# Altium PCB Board.PcbDoc
Units mil, origin at the board's own origin, x right, y up, seen from the top; angles counter-clockwise.
Board outline 3960 x 1820 mil, 2 copper layers (Top Layer, Bottom Layer), stack 61.8 mil thick; 64 components, 64 nets, 260 pads, 48 vias.
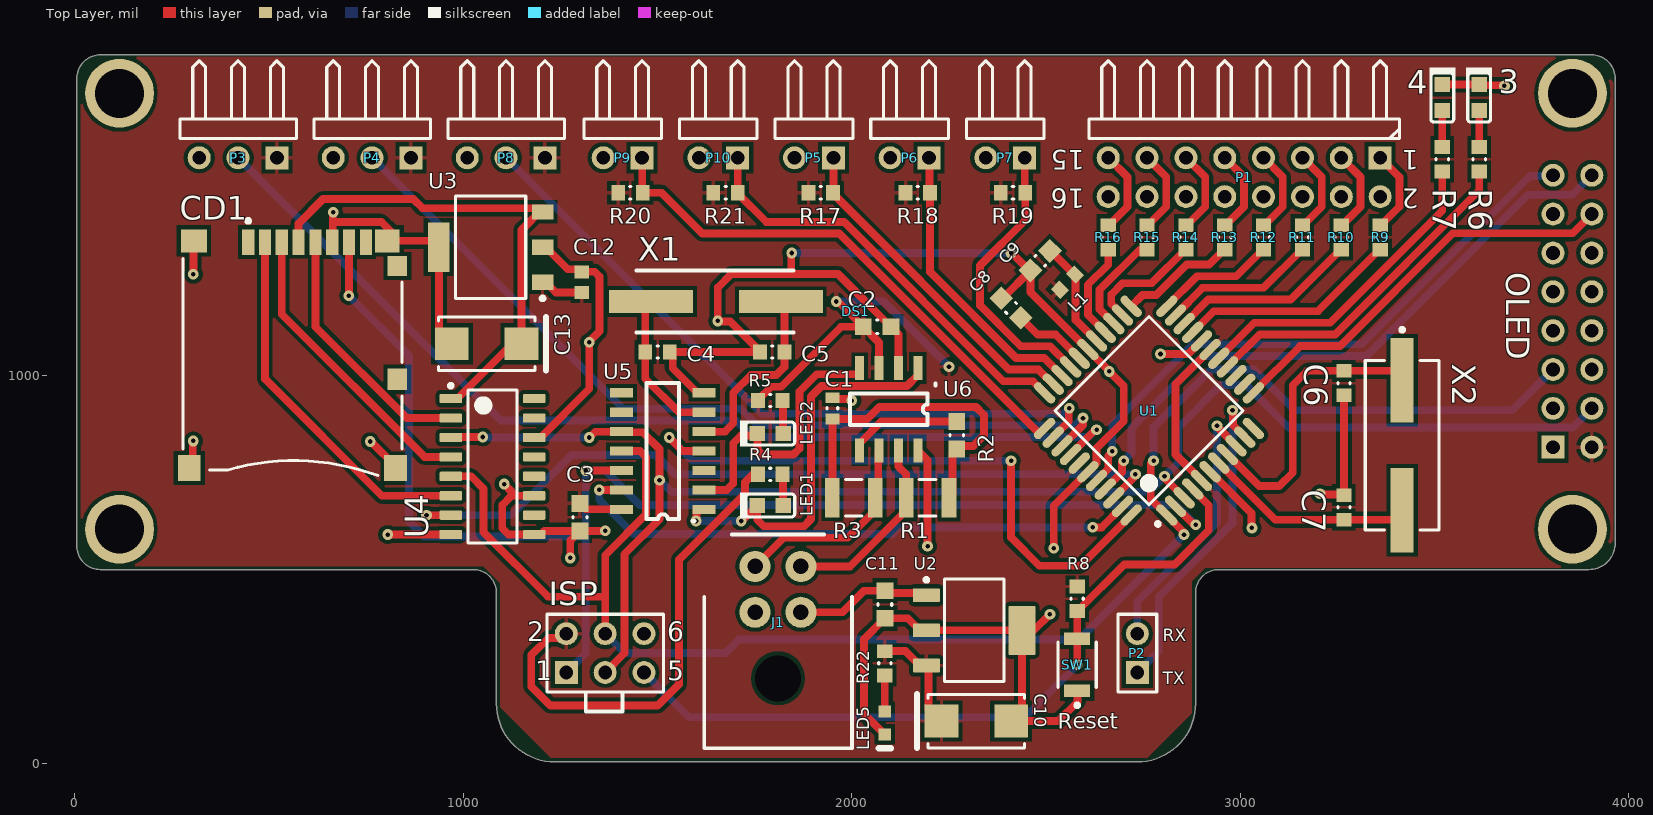
[diagram p0: Top Layer view]
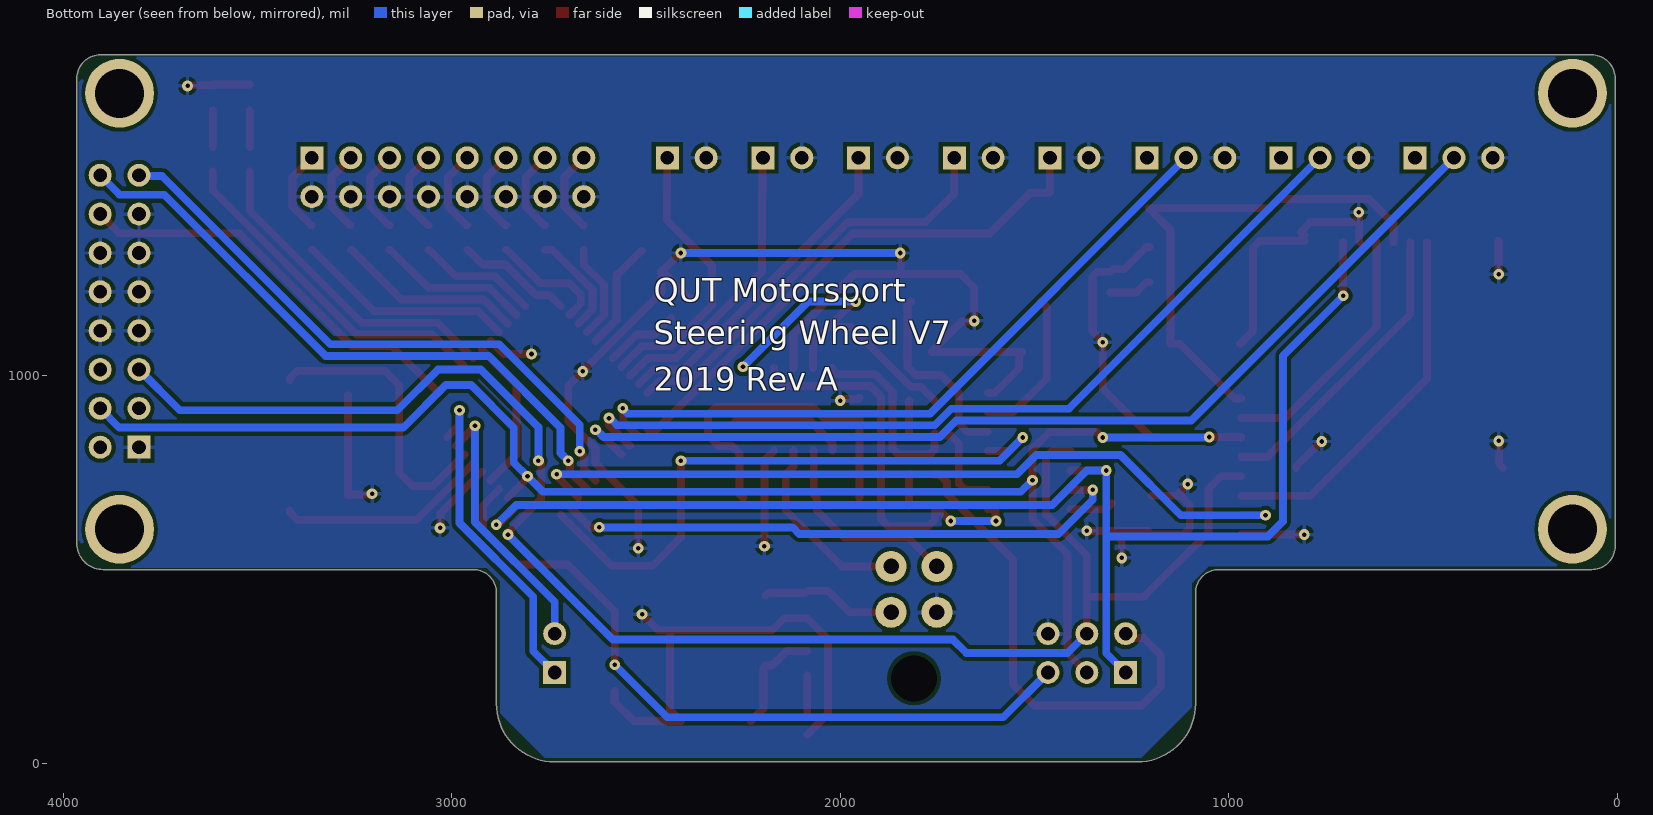
[diagram p1: Bottom Layer view, seen from below]

## Layer stack, top to bottom
Top Solder: solder mask 0.4, Solder Resist, Dk 3.5
Top Layer: signal copper 1.4
Dielectric 1: core 59, Core-043, Dk 4.3
Bottom Layer: signal copper 1.4
Bottom Solder: solder mask 0.4, Solder Resist, Dk 3.5

## Board outline
1025,500 cw(c1025,440) 1085,440 1085,155 ccw(c1235,155) 1235,5 2735,5 ccw(c2735,155) 2885,155 2885,440 cw(c2945,440) 2945,500 3897.61,500 ccw(c3897.61,567.39) 3965,567.39 3965,1765 ccw(c3905,1765) 3905,1825 65,1825 ccw(c65,1765) 5,1765 5,560 ccw(c65,560) 65,500

## Design rules (kind name [scope] priority, off if disabled: settings)
Clearance [All] p1: gap=10 ignorepadtopadclearanceinfootprint=FALSE except(0: Arc-Hole Track-Hole SMDPad-Hole THPad-Hole Via-Hole Fill-Hole Poly-Hole Region-Hole Text-Hole; 6: Arc-SMDPad Track-SMDPad SMDPad-SMDPad)
PolygonConnect [All] p1: connectstyle=Relief reliefconductorwidth=10 reliefentries=4 polygonreliefangle="90 Angle" airgapwidth=10
RoutingVias [All] p1: holewidth=11.81 width=27.56 viastyle="Through Hole" minholewidth=11.81 minwidth=27.56 maxholewidth=11.81 maxwidth=27.56
SolderMaskExpansion [All] p1: expansion=4
Width [All] p1: maxlimit=30 minlimit=10 preferedwidth=20 minimp=50.000000 maximp=50.000000 favimp=50.000000
30 further rules are at their usual default settings.

## Classes and differential pairs
component class SDCard: CD1 U4
component class "Linear Regulator": C10 C11 C12 C13 LED5 R22 U2 U3
component class Input: P3 P4 P5 P6 P7 P8 P9 P10 R17 R18 R19 R20 R21
component class Control: 3 4 C6 C7 C8 C9 DS1 ISP J1 L1 P1 P2 R6 R7 R8 R9 R10 R11 R12 R13 R14 R15 R16 SW1 U1 X2
component class CAN: C1 C2 C3 C4 C5 LED1 LED2 R1 R2 R3 R4 R5 U5 U6 X1

## Components (designator, comment, footprint, x,y, rotation, side; value= is the part's Value field where it differs from the comment)
3 "2V 20mA 0603 Org" KING-LED0603-25-ORANGE_V 3615,1715 r270 top (schematic designator LED3)
4 "2V 20mA 0603 Org" KING-LED0603-25-ORANGE_V 3520,1715 r270 top (schematic designator LED4)
C1 "CAP 4.7nF 50V" CAPC0603(1608)100_L 1950,915 r90 top value=4.7nF
C2 "100nF" CAPC0603(1608)100_M 2065,1125 r180 top
C3 "100nF" CAPC0603(1608)100_M 1300,635 r90 top
C4 "CAP 22pF 16V 0603(1608)" CAPC0603(1608)100_N 1500,1060 r180 top value=22pF
C5 "CAP 22pF 16V 0603(1608)" CAPC0603(1608)100_N 1795,1060 r180 top value=22pF
C6 "CAP 22pF 16V" CAPC0603(1608)100_N 3266.79,980 r90 top value=22pF
C7 "CAP 22pF 16V" CAPC0603(1608)100_N 3266.79,660 r90 top value=22pF
C8 "100nF" CAPC0603(1608)100_M 2410,1173.54 r315 top
C9 "100nF" CAPC0603(1608)100_M 2485,1295 r45 top
C10 "T491C106K016AT" KEMT-T491-C_L 2320.43,110 r0 top
C11 "CAP 100nF 25V" CAPC0603(1608)100_M 2085,410 r90 top value=100nF
C12 "CAP CER 4.7µF" CAPC1608X90X35NL10T15 1305,1240 r270 top
C13 "T491C106K016AT" KEMT-T491-C_L 1060,1081.32 r180 top
CD1 "502774-0891" MOLX-502774-0891_V 560.12,1052.01 r0 top
DS1 "ER-OLEDM032-1Y" ER-OLEDM032-1Y 1985,1200 r0 top locked
ISP "Header 3X2" HDR2X3 1265,235 r0 top (schematic designator ISP1)
J1 "Microfit 3.0 2x2" Microfit_2X2_R_TH 1810,220 r0 top
L1 "Inductor" 1608[0603] 2555,1240 r225 top value=10µH
LED1 "2V 20mA 0603 Org" KING-LED0603-25-ORANGE_V 1790,665 r0 top
LED2 "2V 20mA 0603 Org" KING-LED0603-25-ORANGE_V 1790,850.2 r0 top
LED5 "2V 20mA 0603 Green" LITE-ON-LTST-C191KRKT-2_V 2085,105 r270 top (schematic designator LED)
P1 "Header 8X2" HDR2X8H 3360,1560 r180 top
P2 "UARTCON" HDR1X2 2735,235 r90 top
P3 "POT-1" HDR1X3H 520,1560 r180 top
P4 "POT-2" HDR1X3H 865,1560 r180 top
P5 "Header 2" HDR1X2H 1952.5,1560 r180 top
P6 "Header 2" HDR1X2H 2198.75,1560 r180 top
P7 "Header 2" HDR1X2H 2445,1560 r180 top
P8 "POT-1" HDR1X3H 1210,1560 r180 top
P9 "PADL_A" HDR1X2H 1460,1560 r180 top
P10 "PADL_B" HDR1X2H 1706.25,1560 r180 top
R1 "60R4 1% 1210" RESC1210(3225)_L 2195,685 r180 top value="60.40 Ohm"
R2 "300R 1%" RESC0603(1608)_M 2270,845.54 r270 top value="300.00 Ohm"
R3 "60R4 1% 1210" RESC1210(3225)_L 2005,685 r180 top value="60.40 Ohm"
R4 "300R 5% 0603(1608)" RESC0603(1608)_N 1790,745 r0 top value="300.00 Ohm"
R5 "300R 5% 0603(1608)" RESC0603(1608)_N 1790,935 r0 top value="300.00 Ohm"
R6 "300R 5% 0603(1608)" RESC0603(1608)_N 3615,1556.5 r270 top value="300.00 Ohm"
R7 "300R 5% 0603(1608)" RESC0603(1608)_N 3520,1556.5 r270 top value="300.00 Ohm"
R8 "10K 5% 0603(1608)" RESC0603(1608)_N 2580,425 r90 top value="10000.00 Ohm"
R9 "JMP" RESC0603(1608)_N 3360,1355 r270 top value="300.00 Ohm"
R10 "JMP" RESC0603(1608)_N 3260,1355 r270 top value="300.00 Ohm"
R11 "JMP" RESC0603(1608)_N 3160,1355 r270 top value="300.00 Ohm"
R12 "JMP" RESC0603(1608)_N 3060,1355 r270 top value="300.00 Ohm"
R13 "JMP" RESC0603(1608)_N 2960,1355 r270 top value="300.00 Ohm"
R14 "JMP" RESC0603(1608)_N 2860,1355 r270 top value="300.00 Ohm"
R15 "JMP" RESC0603(1608)_N 2760,1355 r270 top value="300.00 Ohm"
R16 "" RESC0603(1608)_N 2660,1355 r270 top value="300.00 Ohm"
R17 "10K" RESC0603(1608)_N 1920,1470 r0 top value="10000.00 Ohm"
R18 "10K" RESC0603(1608)_N 2170,1470 r0 top value="10000.00 Ohm"
R19 "10K" RESC0603(1608)_N 2415,1470 r0 top value="10000.00 Ohm"
R20 "10K" RESC0603(1608)_N 1430,1470 r0 top value="10000.00 Ohm"
R21 "10K" RESC0603(1608)_N 1675,1470 r0 top value="10000.00 Ohm"
R22 "300R 5% 0603(1608)" RESC0603(1608)_N 2085,258.5 r90 top value="300.00 Ohm"
SW1 "B3U-1000P" OMRON-B3U-1000_V 2580,255 r90 top
U1 "ATmega1284P-AU" 44A_N 2765,909.03 r135 top
U2 "LM2937IMP-5.0" DCY0004A_N 2315,343.46 r0 top
U3 "LT1521CST-3.3#PBF" LT-ST-3-SOT-223_N 1070,1330 r180 top
U4 "CD74HC4050M" D0016A_N 1075,765 r0 top
U5 "MCP2517FD" "MCP2517FD SOIC" 1620,655 r180 top (schematic designator U)
U6 "MCP2561" "MCP2561 SOIC" 2170,1019.09 r270 top (schematic designator U)
X1 "Crystal 20MHz" "Crystal 20MHz" 1650,1190 r0 top
X2 "ATS16ASM-1" CTS-ATS-SM-XTAL-2 3416.79,820 r270 top

## Footprints (in the part's own frame and the unit in brackets; to place one, negate y for a bottom-side part, rotate by r counter-clockwise, add the part's x,y. Pads: shape width x height; smd on the part's side, far side on the other; paste and mask are expansions set on the pad)
44A_N [mm] "Thin QFP, 44-Leads, Body 10x10mm, Pitch 0.8mm, IPC Medium Density"
  oval 1.75x0.55 smd: 1(-5.65,4) 2(-5.65,3.2) 3(-5.65,2.4) 4(-5.65,1.6) 5(-5.65,0.8) 6(-5.65,0) 7(-5.65,-0.8) 8(-5.65,-1.6) 9(-5.65,-2.4) 10(-5.65,-3.2) 11(-5.65,-4) 23(5.65,-4) 24(5.65,-3.2) 25(5.65,-2.4) 26(5.65,-1.6) 27(5.65,-0.8) 28(5.65,0) 29(5.65,0.8) 30(5.65,1.6) 31(5.65,2.4) 32(5.65,3.2) 33(5.65,4)
  oval 0.55x1.75 smd: 12(-4,-5.65) 13(-3.2,-5.65) 14(-2.4,-5.65) 15(-1.6,-5.65) 16(-0.8,-5.65) 17(0,-5.65) 18(0.8,-5.65) 19(1.6,-5.65) 20(2.4,-5.65) 21(3.2,-5.65) 22(4,-5.65) 34(4,5.65) 35(3.2,5.65) 36(2.4,5.65) 37(1.6,5.65) 38(0.8,5.65) 39(0,5.65) 40(-0.8,5.65) 41(-1.6,5.65) 42(-2.4,5.65) 43(-3.2,5.65) 44(-4,5.65)
  silkscreen extent -5.77,-4.35 4.35,4.95, body extent -5,-5 5,5, height 1.2
1608[0603] [mm] "Chip Capacitor, Body 1.6x0.8mm, IPC High Density"
  rect 0.8x0.9 smd: 1(-0.7,0) 2(0.7,0)
  body extent -0.87,-0.47 0.87,0.47, height 1.3
CAPC0603(1608)100_L [mm] "Chip Capacitor, Body 1.6x0.8mm, Height 1.0mm, IPC High Density"
  rect 0.7x0.9 smd: 1(-0.7,0) 2(0.7,0)
  silkscreen extent -0.05,-0.35 0.05,0.35, body extent -0.87,-0.47 0.88,0.48, height 1
CAPC0603(1608)100_M [mm] "Chip Capacitor, Body 1.6x0.8mm, Height 1.0mm, IPC Low Density"
  rect 1.1x1.1 smd: 1(-0.9,0) 2(0.9,0)
  silkscreen extent -0.05,-0.45 0.05,0.45, body extent -0.87,-0.47 0.88,0.48, height 1
CAPC0603(1608)100_N [mm] "Chip Capacitor, Body 1.6x0.8mm, Height 1.0mm, IPC Medium Density"
  rect 0.9x1 smd: 1(-0.8,0) 2(0.8,0)
  silkscreen extent -0.05,-0.4 0.05,0.4, body extent -0.87,-0.48 0.88,0.47, height 1
CAPC1608X90X35NL10T15 [mm] "Chip Capacitor, 2-Leads, Body 1.60x0.80mm, IPC Medium Density"
  rect 0.85x0.95 smd: 1(-0.675,0) 2(0.675,0)
  body extent -0.85,-0.45 0.85,0.45, height 0.9
"Crystal 20MHz" [mm]
  rect 5.5x1.5 smd: 1(-4.25,0) 2(4.25,0)
  silkscreen extent -5.21,-2.03 5.08,2.03, body extent -5.29,-1.91 5.21,1.9, height 4.3
CTS-ATS-SM-XTAL-2 [mm] "SMD, 2-Leads, Body 11.1x4.83mm, Pitch 8.5mm"
  rect 5.5x1.5 smd: 1(-4.25,0) 2(4.25,0)
  silkscreen extent -7.67,-2.41 5.55,2.41, body extent -5.59,-2.42 5.59,2.42, height 4.3
D0016A_N [mm] "SOIC, 16-Leads, Body 10x4mm, Pitch 1.27mm, IPC Medium Density"
  rrect17% 1.45x0.6 smd: 1(-2.725,4.445) 2(-2.725,3.175) 3(-2.725,1.905) 4(-2.725,0.635) 5(-2.725,-0.635) 6(-2.725,-1.905) 7(-2.725,-3.175) 8(-2.725,-4.445) 9(2.725,-4.445) 10(2.725,-3.175) 11(2.725,-1.905) 12(2.725,-0.635) 13(2.725,0.635) 14(2.725,1.905) 15(2.725,3.175) 16(2.725,4.445)
  silkscreen extent -2.85,-5 1.6,5.42, body extent -3,-4.95 3,4.95, height 1.59
DCY0004A_N [mm] "SOT223, 4-Leads, Body 6.7x3.7mm, Pitch 2.3mm, IPC Medium Density"
  rrect11% 1.75x0.9 smd: 1(-3.125,2.3) 2(-3.125,0) 3(-3.125,-2.3)
  rrect6% 1.75x3.2 smd: 4(3.125,0)
  silkscreen extent -3.25,-3.35 1.95,3.42, body extent -3.5,-3.25 3.5,3.25, height 1.62
ER-OLEDM032-1Y [mm] "SPI 3.2 inch OLED Module Display 256x64 Panel Screen,Yellow on Black"
  rect 1.5x1.5 hole 0.9: 1(46.228,-9.779)
  round 1.5 hole 0.9: 2(48.768,-9.779) 3(46.228,-7.239) 4(48.768,-7.239) 5(46.228,-4.699) 6(48.768,-4.699) 7(46.228,-2.159) 8(48.768,-2.159) 9(46.228,0.381) 10(48.768,0.381) 11(46.228,2.921) 12(48.768,2.921) 13(46.228,5.461) 14(48.768,5.461) 15(46.228,8.001) 16(48.768,8.001)
  round 4.5 hole 3.2 unplated: NC(-47.502,13.361) NC(-47.502,-15.139) NC(47.498,-15.139) NC(47.498,13.361)
  body extent -50.29,-17.7 50.29,15.89, height 17.8
HDR1X2 [mm] "Connector; Header; 2 Position"
  rect 1.5x1.5 hole 0.9: 1(0,0)
  round 1.5 hole 0.9: 2(2.54,0)
  silkscreen extent -1.27,-1.27 3.81,1.27
HDR1X2H [mm] "Connector; Header; 2 Position; Right Angle"
  rect 1.5x1.5 hole 0.9: 1(0,0)
  round 1.5 hole 0.9: 2(2.54,0)
  silkscreen extent -1.27,-6.35 3.81,-1.27
HDR1X3H [mm] "Connector; Header; 3 Position; Right Angle"
  rect 1.5x1.5 hole 0.9: 1(0,0)
  round 1.5 hole 0.9: 2(2.54,0) 3(5.08,0)
  silkscreen extent -1.27,-6.35 6.35,-1.27
HDR2X3 [mm] "Connector; Header; 3x2 Position"
  rect 1.5x1.5 hole 0.9: 1(0,0)
  round 1.5 hole 0.9: 2(0,2.54) 3(2.54,0) 4(2.54,2.54) 5(5.08,0) 6(5.08,2.54)
  silkscreen extent -1.27,-1.27 6.35,3.81
HDR2X8H [mm] "Connector; Header; 8x2 Position; Right Angle"
  rect 1.5x1.5 hole 0.9: 1(0,0)
  round 1.5 hole 0.9: 2(0,2.54) 3(2.54,0) 4(2.54,2.54) 5(5.08,0) 6(5.08,2.54) 7(7.62,0) 8(7.62,2.54) 9(10.16,0) 10(10.16,2.54) 11(12.7,0) 12(12.7,2.54) 13(15.24,0) 14(15.24,2.54) 15(17.78,0) 16(17.78,2.54)
  silkscreen extent -1.27,-6.35 19.05,-1.27
KEMT-T491-C_L [mm] "Molded Capacitor, 2-Leads, Body 6.30x3.50mm, IPC High Density"
  rect 2.2x2.15 smd: 1(-2.275,0) 2(2.275,0)
  silkscreen extent -3.87,-1.75 3.15,1.75, body extent -3.15,-1.75 3.15,1.75, height 2.79
KING-LED0603-25-ORANGE_V [mm] "LED, SMT, Body 1.6 x 0.8 mm, 0.25mm Thickness"
  rect 1x1 smd paste+0 mask+0: 1(0.85,0) 2(-0.85,0)
  silkscreen extent -1.97,-0.85 1.6,0.85, body extent -0.8,-0.4 0.8,0.4, height 0.25
LITE-ON-LTST-C191KRKT-2_V [mm] "Chip, 2-Leads, Body 1.6x0.8mm"
  rect 0.8x0.8 smd: 1(-0.75,0) 2(0.75,0)
  silkscreen extent 1.65,-0.4 1.65,0.4, body extent -0.8,-0.4 0.8,0.4, height 0.55
LT-ST-3-SOT-223_N [mm] "SOT223, 4-Leads, Body 6.505x3.505mm, Pitch 2.3mm, IPC Medium Density"
  rect 1.4x1 smd: 1(-3.4,2.3) 2(-3.4,0) 3(-3.4,-2.3)
  rect 1.4x3.25 smd: 4(3.4,0)
  silkscreen extent -3.53,-3.35 2.3,3.47, body extent -1.86,-3.35 1.86,3.35, height 1.8
"MCP2517FD SOIC" [mm]
  rect 1.5x0.6 smd: 1(0,0) 2(0,-1.27) 3(0,-2.54) 4(0,-3.81) 5(0,-5.08) 6(0,-6.35) 7(0,-7.62) 8(5.4,-7.62) 9(5.4,-6.35) 10(5.4,-5.08) 11(5.4,-3.81) 12(5.4,-2.54) 13(5.4,-1.27) 14(5.4,0)
  silkscreen extent 0.63,-8.25 3.76,0.76, body extent 0.74,-8.13 4.64,0.52, height 1.74
"MCP2561 SOIC" [mm]
  rect 1.55x0.6 smd: 1(0,0) 2(0,-1.27) 3(0,-2.54) 4(0,-3.81) 5(5.4,-3.81) 6(5.4,-2.54) 7(5.4,-1.27) 8(5.4,0)
  silkscreen extent 1.02,-4.45 3.74,1.14, body extent 0.51,-4.38 4.64,0.52, height 1.65
Microfit_2X2_R_TH [mil]
  round 80 hole 40: 1(59.06,170) 2(-59.06,170) 3(59.06,288.19) 4(-59.06,288.19)
  round 0 hole 118.11 mask+10: NC(0,0)
  silkscreen extent -190,-180 190,370, body extent -190,-180 190,210, height 290
MOLX-502774-0891_V [mm] "SMD, 14-Leads, Body 15x14.3mm, Pitch 1.1mm"
  rect 0.8x1.68 smd: 1(-2.9,7.385) 2(-1.8,7.385) 3(-0.7,7.385) 4(0.4,7.385) 5(1.5,7.385) 6(2.6,7.385) 7(3.7,7.385) 8(4.8,7.385)
  rect 1.29x1.3 smd: 9(6.855,5.825)
  rect 1.29x1.4 smd: 10(6.855,-1.575)
  rect 1.5x1.7 smd: 11(6.75,-7.375) 12(-6.75,-7.375)
  rect 1.7x1.5 smd: 13(-6.45,7.475)
  rect 1.6x1.5 smd: 14(6.21,7.475)
  silkscreen extent -7.15,-7.88 7.15,8.9, body extent -7.15,-8 7.15,8, height 1.78
OMRON-B3U-1000_V [mm] "SMD, 2-Leads, Body 3x2.5mm"
  rect 0.8x1.7 smd: 1(-1.7,0) 2(1.7,0)
  silkscreen extent -2.77,-1.25 1.5,1.25, body extent -1.5,-1.25 1.5,1.25, height 1.75
RESC0603(1608)_M [mm] "Chip Resistor, Body 1.6x0.8mm, IPC Low Density"
  rect 1.1x1.1 smd: 1(-0.9,0) 2(0.9,0)
  silkscreen extent -0.05,-0.45 0.05,0.45, body extent -0.85,-0.47 0.85,0.47, height 0.6
RESC0603(1608)_N [mm] "Chip Resistor, Body 1.6x0.8mm, IPC Medium Density"
  rect 0.9x1 smd: 1(-0.8,0) 2(0.8,0)
  silkscreen extent -0.05,-0.4 0.05,0.4, body extent -0.85,-0.47 0.85,0.47, height 0.6
RESC1210(3225)_L [mm] "Chip Resistor, Body 3.2x2.5mm, IPC High Density"
  rect 0.95x2.6 smd: 1(-1.4,0) 2(1.4,0)
  silkscreen extent -0.55,-1.2 0.55,1.2, body extent -1.7,-1.35 1.7,1.35, height 0.71

## Part data
3 4 LED1 LED2: library part CMP-0239-00002-1, "LED, SMT, 0603(1608), 0.25mm Tthickness, Super Bright Orange", Forward Current="30 mA", PartNumber=APG1608SEKC/T, Power Dissipation="75 mW", Reverse Voltage="5 V", Storage Temperature="-40 to 85 degC", ComponentLink1Description="Manufacturer URL", ComponentLink1URL=http://www.kingbrightusa.com/, ComponentLink2Description=Datasheet, ComponentLink2URL=http://www.kingbrightusa.com/images/catalog/SPEC/APG1608SEKC-T.pdf, DatasheetVersion="Rev. 4A, 12/2011", Mounting Technology="Surface Mount", PackageDescription="2-Pin SMT LED, 1.6 x 0.8 mm Body, 0.25mm Thickness", PackageReference=LED0603-25-ORANGE, PackageVersion="Rev. 4A, 12/2011", Packing=Reel
C1: library part CMP-1035-02200-1, "CAP 4.7nF 50V ±1% 0603 (1608 Metric) Thickness 1mm SMD", Case-EIA=0603, Case-Metric=1608, Rated Voltage="50 V", Tolerance=±1%, Max Thickness="1 mm", Technology=SMT
C2 C3 C8 C9: library part CMP-1035-02583-1, "CAP 100nF 16V ±5% 0603 (1608 Metric) Thickness 1mm SMD", Case-EIA=0603, Case-Metric=1608, Rated Voltage="16 V", Tolerance=±5%, Max Thickness="1 mm", Technology=SMT
C4 C5 C6 C7: library part CMP-1035-00808-1, "CAP 22pF 16V ±5% 0603 (1608 Metric) Thickness 1mm SMD", Case-EIA=0603, Case-Metric=1608, Rated Voltage="16 V", Tolerance=±5%, Max Thickness="1 mm", Technology=SMT
C10 C13: library part CMP-2000-07197-1, "Tantalum Capacitor, 10 uF, +/- 10%, 16 V, -55 to 125 degC, 2-Pin SMD (T491-C), RoHS, Tape and Reel", Capacitance=10000000pF, Case Code=C, Case Style=Molded, Manufacturer=Kemet, Operating Temp Range=-55Cto125C, Package / Case=6032-28, Package Description="2-Pin Surface Mount Device, Body 6 x 3.2 mm", Package Reference=T491-C, Tolerance (+ or -)=10%, Voltage=16VDC, Construction=SMTChip, Datasheet URL=http://capacitoredge.kemet.com/capedge2/DataSheet/Datasheet-T491C106K016AT.pdf?pn=T491C106K016AT, Datasheet Version=10/2016, DCL=1.6uA, DF=6%, ESR=1.8ohm, Failure Rate=NotRequired, Insulation=NotRequired, Lead Spacing (nom)=NotRequiredmm, Length W/Weld=NotRequiredmm, Length W/Weld (max)=NotRequiredmm, Manufacturer URL=http://www.kemet.com/, Mounting Style=SurfaceMount, Mounting Technology=SurfaceMount, Packaging=TapeandReel, Polarity=Polar, Product Depth (mm)=3.2mm, Product Diameter (mm)=NotRequiredmm, Product Height (mm)=2.5mm, Product Length (mm)=6mm, Rad Hardened=No, Seal=NotRequired, Seated Plane Height=NotRequiredmm, Wire Form=NotRequired
C11: library part CMP-1035-02588-1, "CAP 100nF 25V ±10% 0603 (1608 Metric) Thickness 1mm SMD", Case-EIA=0603, Case-Metric=1608, Rated Voltage="25 V", Tolerance=±10%, Max Thickness="1 mm", Technology=SMT
C12: library part CMP-2006-02523-1, "GRM188R61E475KE11D", Manufacturer=Murata, Part Number=GRM188R61E475KE11D
CD1: library part CMP-2000-05248-1, "Micro SD Memory Card Connector, 0.5 A, 10 V (DC), -25 to 85 degC, 8-Pin SMT, RoHS, Tape and Reel", Manufacturer=Molex, Standard Package=1, 3D Model=502774-0891.stp, Card Type=SecureDigital-microSD™, Catalog Drawings=502774-0891, Category=Connectors,Interconnects, Connector Type=ConnectorandEjector, Contact Finish=Gold, Contact Finish Thickness=20µin(0.51µm), Datasheet URL=https://datasheet.ciiva.com/1104/1499551-1104671.pdf, Datasheet Version="Rev. D, 04/2004", Ejector Side=-, Family=MemoryConnectors-PCCardSockets, Features=Switch, Height Above Board="0.071\"(1.80mm)", Insertion, Removal Method=PushIn,PushOut, Manufacturer URL=http://www.molex.com/, Mounting Feature=Reverse-Bottom, Mounting Type=SurfaceMount,RightAngle, Number of Positions=10(8+2), Online Catalog=microSD™Series, Other Names=WM24066DKR, Packaging=Digi-Reel, RoHS Information=502774-0891CertofCompliance, Series=502774
DS1: "SPI 3.2 inch OLED Module Display 256x64 Panel Screen,Yellow on Black", ComponentLink1Description=BuyDisplay, ComponentLink1URL=https://www.buydisplay.com/default/spi-3-2-inch-oled-module-display-256x64-panel-screen-yellow-on-black
ISP: "Header, 3-Pin, Dual row", LatestRevisionDate=17-Jul-2002, LatestRevisionNote="Re-released for DXP Platform.", Publisher="Altium Limited"
J1: library part Microfit_2x2
LED5: library part CMP-2000-05198-1, "Chip LED, Green, 574 nm, 40 pF, -55 to 85 degC, 2-Pin SMD, RoHS, Tape and Reel", Emitting Color=YellowGreen, Forward Current=30mA, Forward Voltage=2.4V, Manufacturer=Lite-On, Operating Temperature Classification=Industrial, Operating Temp Range=-55Cto85C, Package Type=ChipLed, Power Dissipation=75W, Reverse Voltage=5V, Test Current (It)=20mA, Chip Material=AlGaInP, Datasheet URL=http://download.siliconexpert.com/pdfs/2007/08/26/semi_b/manual/lot/ds/ltst-c191kgkt.pdf, Datasheet Version=Jan-07, DELETED=Compliant, Dominant Wave Length=571nm, High Brightness=Yes, Lens Dimensions=1.1X0.8X0.37mm, Luminous Intensity=35mcd, Lum Intensity=35mcd, Main Category=ChipLED, Manufacturer URL=http://www.us.liteon.com/, Mounting=SurfaceMount, Number of Elements=1, Packaging=TapeandReel, Peak Wavelength=574nm, Pin Count=2, Product Depth (mm)=0.8mm, Product Height (mm)=0.55mm, Product Length (mm)=1.6mm, Rad Hardened=No, Shape Type=Rectangular, Type=Uni-Color, Viewing Angle=130deg
P1: "Header, 8-Pin, Dual row", LatestRevisionDate=17-Jul-2002, LatestRevisionNote="Re-released for DXP Platform.", Publisher="Altium Limited"
P2 P9 P10: library part "Header 2", "Header, 2-Pin", LatestRevisionDate=17-Jul-2002, LatestRevisionNote="Re-released for DXP Platform.", Publisher="Altium Limited"
P3 P4 P8: library part "Header 3", "Header, 3-Pin", LatestRevisionDate=17-Jul-2002, LatestRevisionNote="Re-released for DXP Platform.", Publisher="Altium Limited"
P5 P6 P7: "Header, 2-Pin", LatestRevisionDate=17-Jul-2002, LatestRevisionNote="Re-released for DXP Platform.", Publisher="Altium Limited"
R1 R3: library part CMP-1015-00372-1, "60R4 0.5W 1% 1210 (3225 Metric)  SMD", Case-EIA=1210, Case-Metric=3225, Power="0.5 W", Tolerance="1 %", Technology=SMT
R2: library part CMP-1012-00449-1, "300R 0.1W 1% 0603 (1608 Metric)  SMD", Case-EIA=0603, Case-Metric=1608, Power="0.1 W", Tolerance="1 %", Technology=SMT
R4 R5 R6 R7 R9 R10 R11 R12 R13 R14 R15 R16 R22: library part CMP-1012-00061-1, "300R 0.1W 5% 0603 (1608 Metric)  SMD", Case-EIA=0603, Case-Metric=1608, Power="0.1 W", Tolerance="5 %", Technology=SMT
R8 R17 R18 R19 R20 R21: library part CMP-1012-00098-1, "10K 0.1W 5% 0603 (1608 Metric)  SMD", Case-EIA=0603, Case-Metric=1608, Power="0.1 W", Tolerance="5 %", Technology=SMT
SW1: library part CMP-2100-03586-1, "Ultra-Small Tactile Switch, 0.05 A, 12 V, -25 to 70 degC, 2-Pin SMD, RoHS, Tape and Reel", Case/Package=SMD/SMT, Contact Current Rating=50mA, Insulation Resistance=100MOhm, Manufacturer="Omron Electronic Components", Max Operating Temperature=70degC, Min Operating Temperature=-25degC, Operating Force=1.5N, Package Description="2-Pin Surface Mount Device, Body 3 x 2.5 mm", Package Quantity=1, Package Reference=B3U-1000, Voltage Rating (DC)=12V, Actuator Length=0.4mm, Contact Material=Silver, Current Rating=50mA, Datasheet URL=http://www.omron.com/ecb/products/pdf/en-b3u.pdf, Datasheet Version=42005.0, Depth=2.5mm, Electrical Life=200000Cycles, Height=1.2mm, Illumination Type=Illuminated, Lead Free=LeadFree, Length=4mm, Manufacturer URL=http://www.omron.com/, Max Current Rating=50mA, Mount=SurfaceMount, Orientation=Straight, Packaging=TapeandReel, REACH SVHC=Unknown, RoHSCompliant=true, Switch Travel=0.15mm, Termination=SMD/SMT, Throw Configuration=SPST, Weight=0.022g, Width=3mm
U1: library part CMP-0107-00053-1, "20 MHz 8-bit AVR Microcontroller with 128KB Flash, 44-Pin TQFP Pkg, Industrial Temp", DatasheetVersion="revD, Nov-2009", PackageDescription="44-Pin Plastic Thin Profile Quad Flat Pack, 10 x 10 x 1.0 mm Body, 0.8 mm Pitch (TQFP)", PackageReference=44A, PackageVersion="rev.B, Oct-2001"
U2: library part CMP-0062-01759-3, "500 mA Low Dropout Regulator, 4-pin SOT-223", Manufacturer="Texas Instruments", PackageTopMarking=XYTT*L71B, PowerWise=N, Code_IPC=SOT223-4, Code_JEDEC=TO-261-AA, ComponentLink1Description="Datasheet URL", ComponentLink1URL=http://www.ti.com/general/docs/lit/getliterature.tsp?genericPartNumber=LM2937&fileType=pdf, CompType="LDO IC", PackageDescription="Molded SOT-223, 6.50 x 3.56 x 1.6mm Body, 4 Lead, 2.3mm Pitch", PackageReference=DCY0004A, PinCount=4, RoHS=N
U3: library part CMP-0476-01842-1, "300 mA Low Dropout Regulator with Micropower Quiescent Current and Shutdown, 4.3 to 20 V Vin, 3.3 V Vout, 3-pin SOT223 (ST-3), 0 to 125 degC, Pb-Free", Dropout Voltage(V)=0.5, Manufacturer="Linear Technology", Output Voltage="3.3 V", Shutdown Current(uA)=6, ComponentLink1Description="Manufacturer URL", ComponentLink1URL=http://www.linear.com/, ComponentLink2Description=Datasheet, ComponentLink2URL=http://cds.linear.com/docs/en/datasheet/1521335fb.pdf, ComponentLink3Description="Package Specification", ComponentLink3URL=http://cds.linear.com/docs/en/packaging/SOT_3_05-08-1630.pdf, DatasheetVersion="Rev. B", Discrete Pass Element=no, Iout(mA)=300, Isupply(mA)=0.012, Mounting Technology="Surface Mount", Number of Outputs=1, PackageDescription="3-Pin Plastic SOT-223, 3.505 x 6.505 mm Body, Pitch 2.3 mm", PackageReference=ST-3, PackageVersion=Jun-10, PartNumber=LT1521CST-3.3#PBF, RoHS=TRUE, Vin Max(V)=20, Vin Min(V)=4.3
U4: library part CMP-0440-00356-3, "High Speed CMOS Logic Hex Non-Inverting Buffers, D0016A, TUBE", F @ Nom Voltage(Max)(Mhz)=28, Generic Part Number=CD74HC4050, ICC @ Nom Voltage(Max)(mA)=0.02, Manufacturer="Texas Instruments", Operating Temperature Range(C)="-55 to 125", Rating=Catalog, tpd @ Nom Voltage(Max)(ns)=18, Voltage(Nom)(V)=6, Bits(#)=6, Code_JEDEC="MS-012 variation AC", DatasheetVersion=SCHS205I, Input Type=CMOS, Output Type=CMOS, PackageReference=D0016A, PackageVersion=http://www.ti.com/lit/ml/mpds178g/mpds178g.pdf, VCC(Max)(V)=6, VCC(Min)(V)=2
X2: library part CMP-0585-00002-2, "ATS-SM Series Quartz Crystal, 16 MHz, -20 to 70 degC, 11.1 x 4.83 x 4.3mm SMD, RoHS, Tape and Reel", Frequency="16 MHz", Manufacturer="CTS Corporation", Operating Temperature="-20 to 70 degC", Shunt Capacitance (C0)="7.0 pF Max", ComponentLink1Description="Manufacturer URL", ComponentLink1URL=http://www.ctscorp.com/, ComponentLink2Description=Datasheet, ComponentLink2URL=http://www.ctscorp.com/components/Datasheets/008-0309-0.pdf, ComponentLink3Description="Package Specification", ComponentLink3URL=http://www.ctscorp.com/components/Datasheets/008-0309-0.pdf, Crystal Cut=AT-Cut, DatasheetVersion="Rev. K", Drive Level (Type)="100 uW", ESR Maximum="40 Ohms", Mounting Technology="Surface Mount", Oscillation Mode="Fundamental or 3rd Overtone", PackageDescription="2-Pin SMD, Body 11.1 x 4.83 mm, Pitch 8.5 mm", PackageReference=ATS-SM-XTAL-2, Packing="Tape and Reel", PartNumber=ATS16ASM-1, RoHS=TRUE
L1: Code_IEC=1005, Code_JEITA=0402, LatestRevisionDate=29-May-2009, LatestRevisionNote="IPC-7351 Footprint Added.", PackageDescription="Chip Inductor", PackageReference=0402-A, Published=8-Jun-2000, Publisher="Altium Limited"
X1: ComponentLink1Description=Datasheet, ComponentLink1URL=http://cfd.citizen.co.jp/english/prod-tech/product/pdf/datasheet_AT/HCM49_E.pdf

## Via types
v1: diameter 27.56, hole 11.81, Top Layer to Bottom Layer, 48 vias

## Nets (pads, with @x,y where several pads share a name; then routed paths per layer and width w, separated by ;. In a path a pad name is that pad's centre, name@x,y a point inside that pad or via, vN(x,y) a via of type N, cw(c..) or ccw(c..) an arc to the next point about the centre after c; other vN are vias at no path point)
+3V3: C13.1 CD1.4 U3.3 U4.1 | length 1325.8
  Top Layer w20: CD1.4 575.87,1390.87 638.78,1453.78 871.22,1453.78 895,1430 1205.43,1430 1149.57,1374.13 C13.1 1125.77,1081.32 984.45,940 U4.1
+5: C2.2 C3.2 C10.1 C12.2 DS1.2 ISP.2 L1.2 P3.1 P4.1 P8.1 R4.1 R5.1 R8.2 R17.1 R18.1 R19.1 R20.1 R21.1 R22.2 U1.5 U1.17 U1.38 U2.3 U3.1 U5.14 U6.3 | length 3088
  Top Layer w20: U3.1 1211.73,1239.45 1237.76,1213.43 C12.2 ; ISP.2 1254.43,335 1242.9,323.46 1218.46,323.46 1175,280 1175,199.02 1224.02,150 1500,150 1555,205 1555,525.46 1725,695.46 1725,725 1745,745 R4.1 ; C3.2 1315.43,655 U5.14 ; R5.1 1758.5,936.97 1792.22,970.69 1818.11,970.69 1972.43,1125 C2.2 ; v1(1960,1190) 1961.45,1188.55 1966.01,1188.55 C2.2 ; U6.3 2070,1084.57 C2.2 ; R22.2 2138.15,290 2175.24,252.91 U2.3 2197.56,247.32 2197.56,142.32 2229.88,110 C10.1 ; U1.5 2833.21,796.28 2833.21,977.23 U1.17
  Bottom Layer w20: v1(1960,1190) 2081.89,1190 v1(2250.12,1021.78)
CAN_CS: U1.43 U5.13 | length 1495.8
  Top Layer w20: v1(1350,705) U5.13 ; v1(2620,608.59) 2643.16,608.59 2696.79,662.23 U1.43
  Bottom Layer w20: v1(1350,705) 1350,680 1438.78,591.22 2105.09,591.22 2122.46,608.59 v1(2620,608.59)
CAN_H: J1.3 R1.2 U6.7 | length 492.8
  Top Layer w20: J1.3 1995.55,508.19 2139.88,652.52 R1.2 2139.88,745.12 2120,765 U6.7
CAN_L: J1.4 R3.1 U6.6 | length 527
  Top Layer w20: J1.4 1824.5,581.74 1989.34,581.74 2060.12,652.52 R3.1 2068.19,693.07 2068.19,804.69 U6.6
CAN_X1_20MHz: C4.2 U5.6 X1.1 | length 391.7
  Top Layer w20: X1.1 1468.5,1175.83 C4.2 1468.5,991.5 1555,905 U5.6
CAN_X2_20MHz: C5.1 U5.5 X1.2 | length 493.6
  Top Layer w20: U5.5 1673.28,855 1695,876.72 1695,955 1740.69,1000.69 1805.69,1000.69 1826.5,1021.5 C5.1 1826.5,1180.83 X1.2
GND: 3.2 4.2 C1.2 C2.1 C3.1 C4.1 C5.2 C6.1 C7.2 C8.1 C9.1 C10.2 C11.1 C12.1 C13.2 CD1.6 CD1.11 CD1.12 CD1.13 CD1.14 DS1.1 DS1.7 DS1.8 DS1.9 DS1.10 DS1.11 DS1.12 DS1.13 ISP.6 J1.2 LED5.2 P1.2 P1.4 P1.6 P1.8 P1.10 P1.12 P1.14 P1.16 P3.3 P4.3 P5.2 P6.2 P7.2 P8.3 P9.2 P10.2 SW1.1 U1.6 U1.18 U1.28 U1.39 U2.2 U2.4 U3.2 U3.4 U4.8 U4.9 U4.11 U4.14 U5.7 U6.2 U6.8 | length 7616.8
  Top Layer w20: CD1.12 303.55,770.84 303.55,829.71 v1(305,831.16) ; v1(305,1260) 305,1345.12 CD1.13 ; CD1.6 663.74,1344.02 663.74,1395 ; v1(665,1420) 663.74,1418.74 663.74,1395 ; v1(760,829.61) 761.85,829.61 825.87,765.59 CD1.11 ; v1(805,590) U4.8 ; C13.2 969.45,1081.32 937.13,1113.64 937.13,1329.02 U3.4 919.84,1346.3 CD1.14 811.59,1353.28 804.87,1360 814.42,1369.55 788.98,1395 663.74,1395 ; v1(1105,720) 1124.02,700.98 1124.02,690 ; U4.14 1199.02,840 1324.28,965.26 v1(1324.28,1085) 1324.28,1087.05 1350.58,1113.35 1350.58,1254.1 1338.11,1266.57 C12.1 1298.27,1273.31 1268.43,1273.31 1211.73,1330 U3.2 ; U4.11@1199.02,690 U4.11 1124.02,690 ; v1(1275,530) 1275,574.57 C3.1 ; v1(1365,600) 1364.57,599.57 C3.1 ; U5.7 1602.28,955 1539.21,1018.07 1539.21,1052.28 C4.1 C5.2 1763.5,1061.97 1686.92,1138.55 1656.45,1138.55 v1(1655,1140) 1655,1225.88 1690,1260.88 1843.84,1260.88 ; v1(1845.1,1315) 1843.84,1313.74 1843.84,1260.88 ; C1.2 1953.78,938.78 1994.18,938.78 1997.95,935 v1(2000,935) ; LED5.2 2031.42,129.06 2031.42,320.98 C11.1 2144.13,374.57 2175.24,343.46 U2.2 U2.4 ; U6.2 2120,1105.43 C2.1 1964.55,1260.88 1843.84,1260.88 ; U6.8 2195,781.5 v1(2195,560) ; C8.1 2388.59,1198.59 C9.1 ; v1(2410,1315) 2412.05,1315 2457.1,1269.95 C9.1 ; v1(2510,385) 2468.46,343.46 U2.4 ; v1(2520,555) 2520,664.03 U1.39 2607.71,752.19 2630,774.48 2630,812.23 2700,882.23 2700,972.4 v1(2662.4,1010) 2662.4,1011.18 2607.71,1065.87 U1.28 2459.95,1214.08 C9.1 ; SW1.1 2581.17,186.9 2581.17,160 2531.17,110 C10.2 2438.03,138.03 U2.4 ; v1(2794.53,1055) 2865.98,1055 2899.57,1088.59 U1.18 ; U1.6 3028.55,645.48 3028.55,608.59 v1(3030,607.14) ; v1(3205,695) 3206.45,693.55 3264.74,693.55 C7.2 C6.1 ; 4.2 3.2 3617.02,1746.45 3678.55,1746.45 v1(3680,1745) ; 1124.02,690 1100,665.98 1100,606.5 1116.5,590 U4.9 1199.02,590 1208.58,599.57 C3.1
  Bottom Layer w20: v1(1845.1,1315) v1(2410,1315)
INT1: U5.9
INT2: U5.8
MCU_BTN_A: P5.1 R17.2 U1.32 | length 862.8
  Top Layer w20: P5.1 1952.5,1471 R17.2 1951.5,1468.03 2404.75,1014.78 2480.64,1014.78 2518.18,977.23 U1.32
MCU_BTN_B: P6.1 R18.2 U1.31 | length 744.9
  Top Layer w20: P6.1 2200.12,1558.63 2200.12,1471.37 R18.2 2201.5,1266.08 2422.8,1044.78 2495.18,1044.78 2540.45,999.51 U1.31
MCU_BTN_C: P7.1 R19.2 U1.30 | length 727.6
  Top Layer w20: P7.1 2445,1471.5 R19.2 2446.5,1399.27 2330,1282.77 2330,1180 2435.22,1074.78 2510.17,1074.78 U1.30
MCU_LED_A: R6.2 U1.15 | length 885.3
  Top Layer w20: U1.15 3050.3,1105.24 3244.19,1105.24 3615,1476.05 R6.2
MCU_LED_B: R7.2 U1.16 | length 834.1
  Top Layer w20: U1.16 3035.75,1135.24 3231.77,1135.24 3520,1423.47 R7.2
MCU_MISO: CD1.7 ISP.1 U1.2 U5.12 | length 3587.1
  Top Layer w20: v1(705,1205) 705.79,1205.79 CD1.7 ; v1(1315,755) U5.12 ; U1.2 2880.86,615 v1(2885,615)
  Bottom Layer w20: v1(705,1205) 860,1050 860,623.98 898.98,585 1315,585 ; ISP.1 1315,285 1315,585 ; v1(2885,615) 2833.78,666.22 1453.78,666.22 1365,755 v1(1315,755) 1315,585
MCU_MOSI: DS1.5 ISP.4 U1.1 U4.5 U5.11 | length 4286.9
  Top Layer w20: U4.5 1020,740 1051.81,708.19 1051.81,596.38 1218.19,430 1365,430 ; ISP.4 1365,430 ; U5.11 1455,805 1470,790 1470,642.05 1365,537.05 1365,430 ; v1(2776.82,780) 2769.53,772.71 2769.53,681.79 U1.1 2810.93,639.94 2853.55,597.32 2853.55,591.45 v1(2855,590)
  Bottom Layer w20: ISP.4 1414.53,285.47 1675.28,285.47 1709.81,320 2585,320 v1(2855,590) ; v1(2776.82,780) 2776.82,866.82 2925,1015 3035,1015 3140,910 3700,910 DS1.5
MCU_PADL_A: P9.1 R20.2 U1.34 | length 1387.6
  Top Layer w20: P9.1 1460.75,1559.25 1460.75,1470.75 R20.2 1510,1470 1615,1365 1967.57,1365 2482.38,850.2 2483.46,850.2 U1.34
MCU_PADL_B: P10.1 R21.2 U1.33 | length 1094.4
  Top Layer w20: P10.1 1706.37,1559.88 1706.37,1470.12 R21.2 1706.5,1468.03 1779.53,1395 1980,1395 2390.22,984.78 2466.1,984.78 2495.91,954.96 U1.33
MCU_POT_A: P3.2 U1.37 | length 2608.7
  Top Layer w20: U1.37 2626.89,860 v1(2630,860)
  Bottom Layer w20: P3.2 1096.22,883.78 1701.37,883.78 1743.93,841.22 2609.18,841.22 2627.95,860 v1(2630,860)
MCU_POT_B: P4.2 U1.36 | length 2217.2
  Top Layer w20: U1.36 2541.32,818.55 2595,872.23 v1(2595,890)
  Bottom Layer w20: P4.2 1411.22,913.78 1713.79,913.78 1756.35,871.22 2574.18,871.22 2592.95,890 v1(2595,890)
MCU_POT_C: P8.2 U1.35 | length 1819.9
  Top Layer w20: U1.35 2518.63,841.27 2558.55,881.2 2558.55,913.55 v1(2560,915)
  Bottom Layer w20: P8.2 1768.78,901.22 2546.22,901.22 v1(2560,915)
MCU_RESET: ISP.5 R8.1 SW1.2 U1.4 | length 1905
  Top Layer w20: v1(2580,255) SW1.2 R8.1 2581.97,393.5 2701.57,513.11 2830.88,513.11 2918.78,601.01 2918.78,665.72 2877.75,706.75 U1.4
  Bottom Layer w20: ISP.5 1580,120 2445,120 v1(2580,255)
MCU_RX: P2.2 U1.9 | length 691.7
  Top Layer w20: v1(2940,870) 2940,868.1 2989.1,819 U1.9
  Bottom Layer w20: P2.2 2735,417.23 2940,622.23 v1(2940,870)
MCU_SCK: DS1.4 ISP.3 U1.3 U4.3 U5.10 | length 3917.2
  Top Layer w20: U4.3 968.94,841.22 v1(1050,841.22) ; v1(1324.28,840) 1339.28,855 U5.10 1409.21,853.19 1462.01,853.19 1505,810.2 v1(1505,730) 1505,629.54 1414.53,539.07 1414.53,284.53 ISP.3 ; v1(2805,740) 2806.45,738.55 2806.45,733.96 U1.3
  Bottom Layer w20: v1(1050,841.22) 1051.22,840 v1(1324.28,840) ; v1(1505,730) 1535,700 2765,700 v1(2805,740) 2840,775 2840,865 2950,975 3015,975 3124.53,865.47 3855.47,865.47 DS1.4
MCU_TX: P2.1 U1.10 | length 858.7
  Top Layer w20: v1(2980,910) 2981.45,908.55 2981.45,871.2 3011.37,841.27 U1.10
  Bottom Layer w20: P2.1 2790,290 2790,429.8 2980,619.8 v1(2980,910)
NetC1_1: C1.1 R1.1 R2.2 R3.2 | length 884.9
  Top Layer w20: R3.2 1949.94,685.06 1949.94,887.38 C1.1 2039.82,887.44 2071,918.62 2319.66,918.62 2340,898.28 2340,845 2313.28,818.28 2278.18,818.28 R2.2 2258.82,798.92 2258.82,693.7 R1.1
NetC8_2: C8.2 U1.29 | length 193.6
  Top Layer w20: C8.2 2478.76,1104.78 2524.71,1104.78 U1.29
NetC9_2: C9.2 L1.1 U1.27 | length 283.4
  Top Layer w20: C9.2 2511.99,1320.06 2572.55,1259.49 L1.1 2575.88,1258.1 2575.88,1142.69 U1.27
NetCD1_2: CD1.2 U4.6 | length 955
  Top Layer w20: CD1.2 489.25,990.75 790,690 U4.6
NetCD1_3: CD1.3 U4.4 | length 772.7
  Top Layer w20: CD1.3 532.56,1157.44 900,790 U4.4
NetCD1_5: CD1.5 U4.2 | length 663.5
  Top Layer w20: CD1.5 619.17,1125.25 854.42,890 U4.2
NetLED1_1: LED1.1 R4.2 | length 80.8
  Top Layer w20: R4.2 1822.48,744.02 1822.48,665.98 LED1.1
NetLED1_2: LED1.2 U5.1 U6.1 | length 1045
  Top Layer w20: v1(1598.75,625) 1598.75,627.05 1600.47,628.77 1600.47,653.19 1602.28,655 U5.1 ; v1(1715,625) 1716.53,625 LED1.2 1756.53,628.47 1773.26,611.74 1876.74,611.74 1895,630 1895,945.62 1921.94,972.56 2142.17,972.56 2170,1000.39 U6.1
  Bottom Layer w20: v1(1598.75,625) v1(1715,625)
NetLED2_1: LED2.1 R5.2 | length 85.6
  Top Layer w20: R5.2 1822.48,934.02 1822.48,851.18 LED2.1
NetLED2_2: LED2.2 U5.2 U6.4 | length 754.3
  Top Layer w20: U5.2 1678.28,705 1695,721.72 1695,825 1715,845 1751.34,845 LED2.2 1757,849.73 1757,808 1768.72,796.28 1850,796.28 1865,811.28 1865,958.05 1909.51,1002.56 2018.19,1002.56 2020,1004.37 U6.4
NetLED3_1: 3.1 R6.1 | length 93.5
  Top Layer w20: R6.1 3.1
NetLED4_1: 4.1 R7.1 | length 93.5
  Top Layer w20: R7.1 4.1
NetLED5_1: LED5.1 R22.1 | length 92.5
  Top Layer w20: LED5.1 R22.1
NetP1_1: P1.1 R9.1 | length 215.7
  Top Layer w20: R9.1 3361.97,1386.5 3409.53,1434.05 3409.53,1510.47 P1.1
NetP1_3: P1.3 R10.1 | length 215.7
  Top Layer w20: R10.1 3261.97,1386.5 3309.53,1434.05 3309.53,1510.47 P1.3
NetP1_5: P1.5 R11.1 | length 215.7
  Top Layer w20: R11.1 3161.97,1386.5 3209.53,1434.05 3209.53,1510.47 P1.5
NetP1_7: P1.7 R12.1 | length 215.7
  Top Layer w20: R12.1 3061.97,1386.5 3109.53,1434.05 3109.53,1510.47 P1.7
NetP1_9: P1.9 R13.1 | length 215.7
  Top Layer w20: R13.1 2961.97,1386.5 3009.53,1434.05 3009.53,1510.47 P1.9
NetP1_11: P1.11 R14.1 | length 215.7
  Top Layer w20: R14.1 2861.97,1386.5 2909.53,1434.05 2909.53,1510.47 P1.11
NetP1_13: P1.13 R15.1 | length 215.7
  Top Layer w20: R15.1 2761.97,1386.5 2809.53,1434.05 2809.53,1510.47 P1.13
NetP1_15: P1.15 R16.1 | length 215.7
  Top Layer w20: R16.1 2661.97,1386.5 2709.53,1434.05 2709.53,1510.47 P1.15
NetR2_1: R2.1 U6.5 | length 291.8
  Top Layer w20: U6.5 2020,825.2 2075.77,880.97 R2.1
NetU1_44: U1.44 U5.4 | length 1600
  Top Layer w20: v1(1530,840) 1565,805 U5.4 ; v1(2410,780) 2410,582.38 2482.38,510 2588.68,510 U1.44
  Bottom Layer w20: v1(1530,840) 1590,780 v1(2410,780)
OLED_CS: DS1.16 U1.41 | length 1640.1
  Top Layer w20: U1.41 2652.25,707.65 2695.35,750.74 2695.35,775.35 v1(2700,780)
  Bottom Layer w20: v1(2700,780) 2720,800 2720,865 2905,1050 3325,1050 3740,1465 3855,1465 DS1.16
OLED_DC: DS1.14 U1.12 | length 1061.9
  Top Layer w20: U1.12 3153.92,1075.24 3256.62,1075.24 3546.85,1365.47 3855.47,1365.47 DS1.14
OLED_Reset: DS1.15 U1.40 | length 1560.7
  Top Layer w20: U1.40 2660,759.49 2660,792.41 2670.27,802.68 v1(2670.27,804.73)
  Bottom Layer w20: v1(2670.27,804.73) 2670.27,872.7 2877.57,1080 3312.57,1080 3745.47,1512.9 3802.9,1512.9 DS1.15
PC0: R9.2 U1.19 | length 570.3
  Top Layer w20: U1.19 2932.13,1165.24 3199.77,1165.24 3358.03,1323.5 R9.2
PC1: R10.2 U1.20 | length 483.4
  Top Layer w20: U1.20 2917.58,1195.24 3129.77,1195.24 3258.03,1323.5 R10.2
PC2: R11.2 U1.21 | length 396.4
  Top Layer w20: U1.21 2903.04,1225.24 3059.77,1225.24 3158.03,1323.5 R11.2
PC3: R12.2 U1.22 | length 309.5
  Top Layer w20: U1.22 2888.5,1255.24 2989.77,1255.24 3058.03,1323.5 R12.2
PC4: R13.2 U1.23 | length 301.3
  Top Layer w20: U1.23 2748.24,1206.85 2783.81,1206.85 2862.19,1285.24 2919.77,1285.24 2958.03,1323.5 R13.2
PC5: R14.2 U1.24 | length 304.7
  Top Layer w20: U1.24 2667.71,1184.49 2667.71,1207.86 2696.7,1236.85 2771.38,1236.85 2858.03,1323.5 R14.2
PC6: R15.2 U1.25 | length 267.4
  Top Layer w20: U1.25 2637.71,1169.95 2637.71,1220.28 2740.93,1323.5 R15.2
PC7: R16.2 U1.26 | length 252.8
  Top Layer w20: U1.26 2652.25,1111.31 2607.71,1155.85 2607.71,1232.71 2660,1285 R16.2
SD_CS: U1.42 U4.7 | length 2055.8
  Top Layer w20: v1(905,640) U4.7 ; U1.42 2728.55,738.96 2728.55,743.67 v1(2730,745.12)
  Bottom Layer w20: v1(905,640) 1123.52,640 1278.52,795 1495,795 1544.88,745.12 v1(2730,745.12)
VCC: C11.2 J1.1 U2.1 | length 350.6
  Top Layer w20: J1.1 1975.98,390 2031.42,445.43 C11.2 2090.71,439.72 2186.26,439.72 U2.1
X1_16MHz: C6.2 U1.8 X2.1 | length 751
  Top Layer w20: U1.8 2967.28,796.28 3048.56,715 3100.53,715 3135,749.47 3135,974.51 3171.99,1011.5 C6.2 3397.27,1011.5 3416.79,991.97 X2.1
X2_16MHz: C7.1 U1.7 X2.2 | length 545.2
  Top Layer w20: U1.7 3090.07,628.5 C7.1 3397.27,628.5 3416.79,648.03 X2.2
pads on no net: CD1.1 CD1.8 CD1.9 CD1.10 DS1.3 DS1.6 DS1.NC J1.NC U1.11 U1.13 U1.14 U4.10 U4.12 U4.13 U4.15 U4.16 U5.3

## Polygon pours and split planes (outlines as drawn)
+5 on Top Layer "Top Layer-+5" (solid, pour order 10): 3890,1820 3960,1755 3960,575 3890,505 2910,505 2875,470 2875,130 2760,15 1225,15 1095,145 1095,465 1051.81,508.19 76.81,508.19 15,570 15,1760 65.19,1820
GND on Bottom Layer "Bottom Layer-GND" (solid, pour order 12): 3890,1820 3955,1760 3960,1755 3960,575 3890,505 2910,505 2875,470 2875,130 2760,15 1225,15 1095,145 1095,465 1051.81,508.19 75,508.19 15,568.19 15,1760 65,1820

## Silkscreen, mask and mechanical layers (free items; w line width, h text height)
Top Overlay:
  lines w10: 1315,180 1315,135 1410,135 1410,180
  text "OLED" at 3685,1265 h60 r270
  text "RX" at 2800,315 h32
  text "TX" at 2800,205 h32
  text "Reset" at 2530,90 h40
Bottom Overlay:
  text "QUT Motorsport" at 2480,1190 h60
  text "Steering Wheel V7" at 2480,1080 h60
  text "2019 Rev A" at 2480,960 h60
BoardOutline:
  the board outline again, w10

## Text inside footprints (layer, text, board x,y; h text height)
ISP: Top Overlay "6" at 1525,315 h50; Top Overlay "5" at 1525,215 h50; Top Overlay "2" at 1165,315 h50; Top Overlay "1" at 1185,215 h50
P1: Top Overlay "16" at 2600,1480 h50 r180; Top Overlay "15" at 2600,1580 h50 r180; Top Overlay "1" at 3460,1580 h50 r180; Top Overlay "2" at 3460,1480 h50 r180